# Altium PCB 7CUN RGB V0.0.1.PcbDoc
Units mil, origin at the board's own origin, x right, y up, seen from the top; angles counter-clockwise.
Board outline 3149.61 x 2165.35 mil, 2 copper layers (Top Layer, Bottom Layer); 76 components, 91 nets, 308 pads, 149 vias.
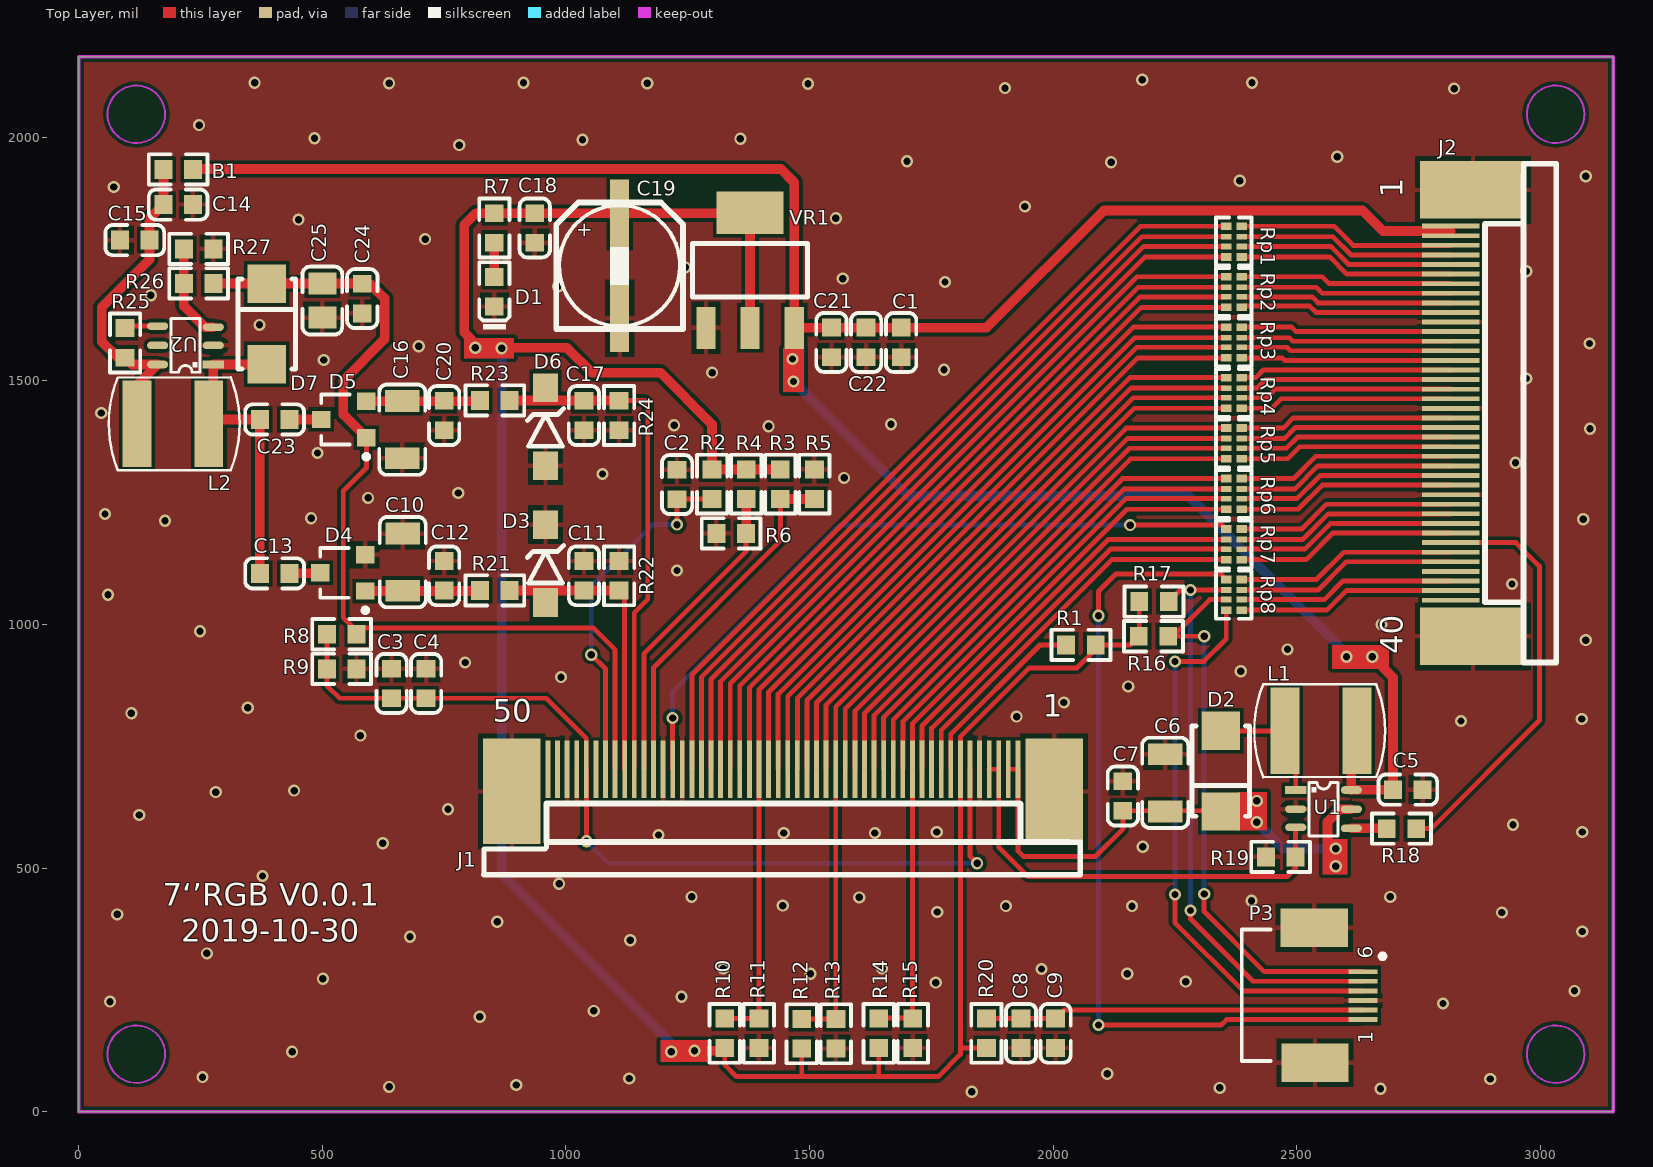
[diagram p0: Top Layer view]
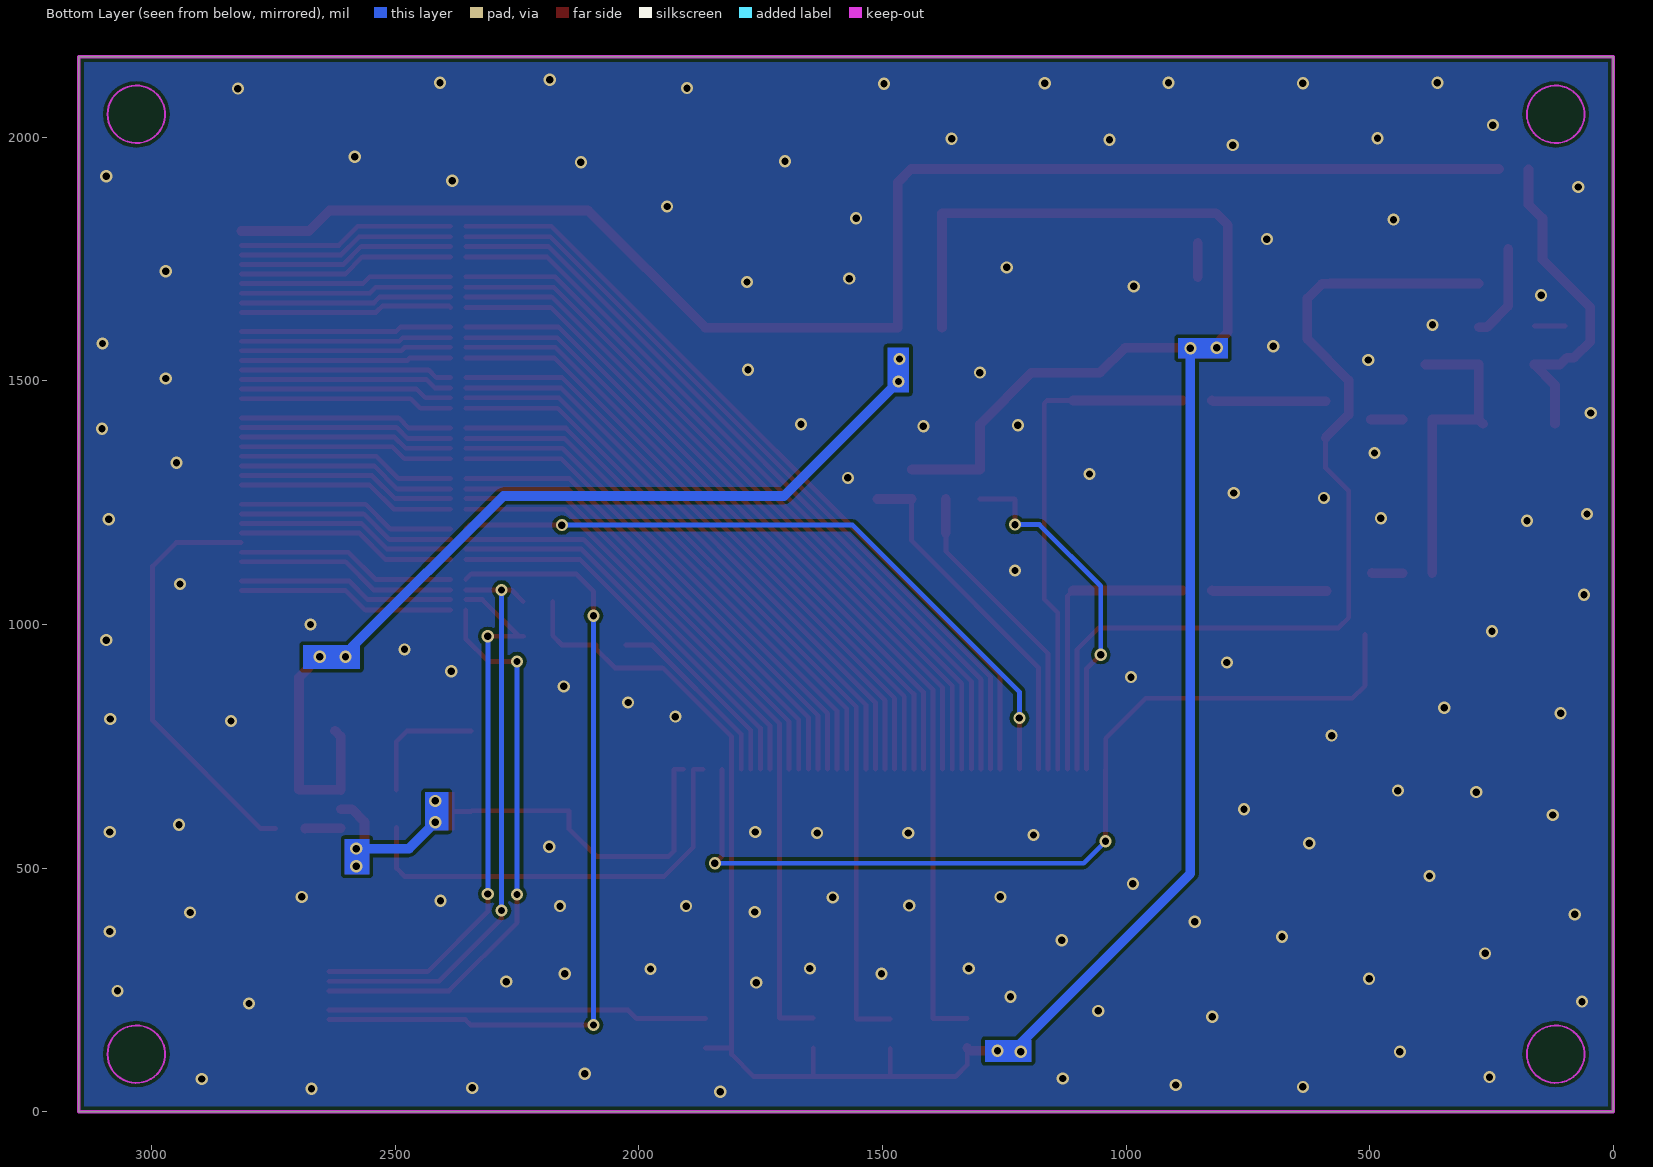
[diagram p1: Bottom Layer view, seen from below]
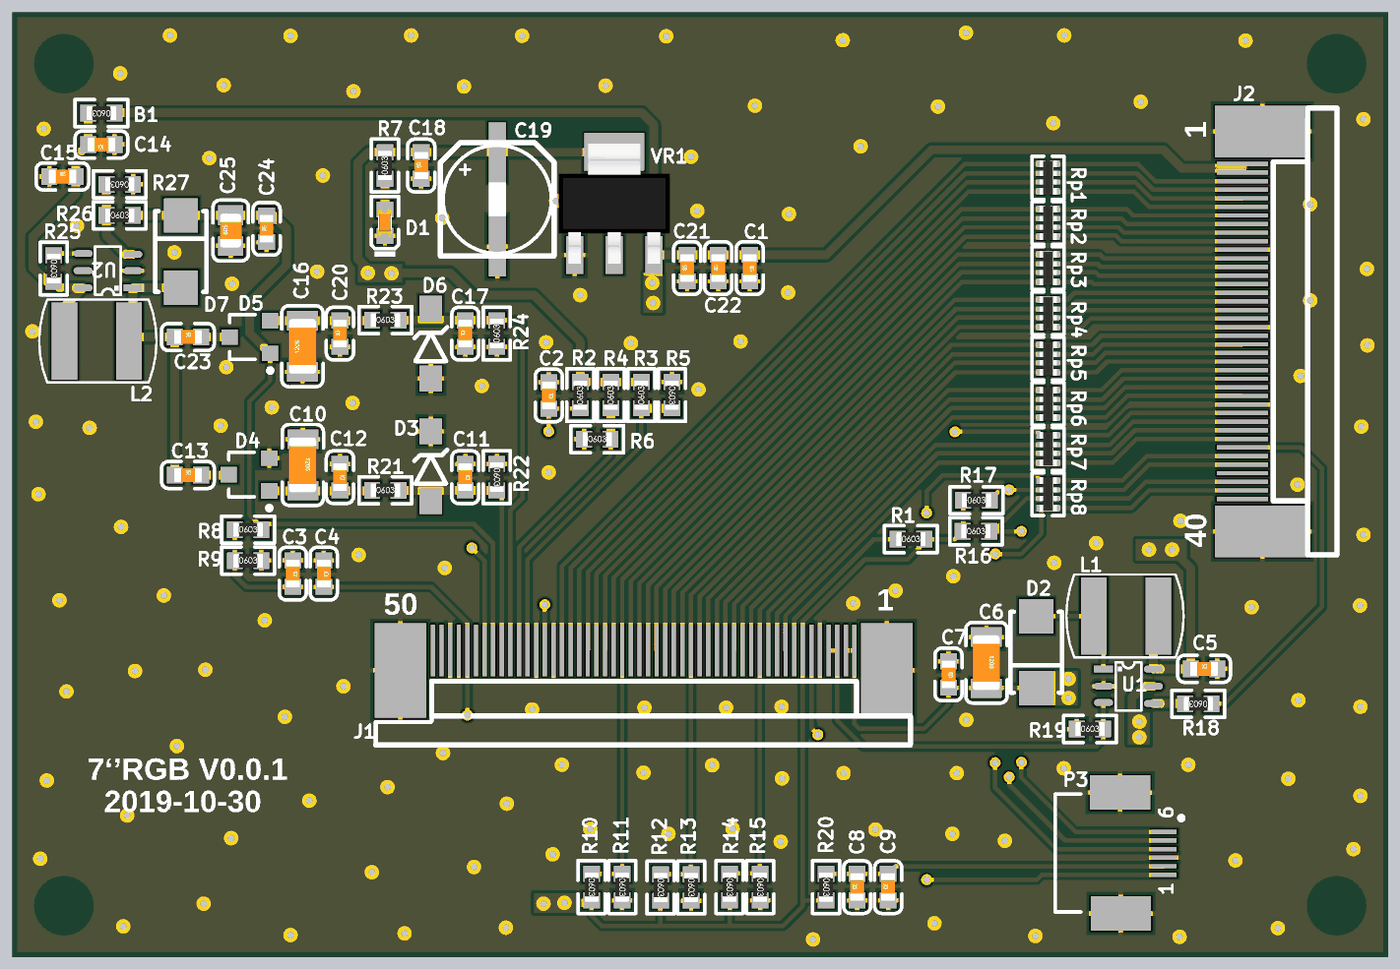
[diagram p2: 3D render of the assembled board from above, using the file's embedded part models]

## Layer stack, top to bottom
Top Layer: signal copper 1.4
Dielectric: dielectric 12.6, FR-4, Dk 4.8
Bottom Layer: signal copper 1.4

## Board outline
0,0 0,2165.35 3149.61,2165.35 3149.61,0

## Design rules (kind name [scope] priority, off if disabled: settings)
Clearance [All] p1: gap=7
ComponentClearance [All] p1: gap=0 collisioncheckmode=3 verticalgap=0 showdistances=FALSE
HoleToHoleClearance [All] p1: gap=0 allowstackedmicrovias=TRUE
MinimumSolderMaskSliver [All] p1: minsoldermaskwidth=0
PolygonConnect PolygonConnect_1 [IsVia] p1: connectstyle=Direct reliefconductorwidth=10 reliefentries=4 polygonreliefangle="90 Angle" airgapwidth=10
PolygonConnect [All] p2: connectstyle=Relief reliefconductorwidth=10 reliefentries=4 polygonreliefangle="90 Angle" airgapwidth=10
RoutingVias [All] p1: holewidth=15 width=25 viastyle="Through Hole" minholewidth=15 minwidth=25 maxholewidth=28 maxwidth=50
SilkToSilkClearance [All] p1: silktosilkclearance=0
SilkToSolderMaskClearance [IsPad] p1: minsilkscreentomaskgap=0 clearancetoexposedcopper=TRUE
SolderMaskExpansion [All] p1: expansion=4
Width [All] p1: maxlimit=50 minlimit=7 preferedwidth=10
23 further rules are at their usual default settings.

## Components (designator, comment, footprint, x,y, rotation, side; value= is the part's Value field where it differs from the comment)
B1 "0Ω (0R0) ±1%" 0603_R 204,1934 r180 top
C1 "100nF (104) 10% 50V" 0603_C 1688,1579 r270 top
C2 "100nF (104) 10% 50V" 0603_C 1228,1287.32 r270 top
C3 "1uF (105) 10% 50V" 0603_C 642,879 r270 top
C4 "100nF (104) 10% 50V" 0603_C 713,879 r270 top
C5 "10uF (106) 10% 10V" 0603_C 2728,661 r0 top
C6 "10uF (106) 10% 50V" 1206_C 2230,675 r270 top
C7 "100nF (104) 10% 50V" 0603_C 2143,648 r270 top
C8 "10uF (106) 10% 10V" 0603_C 1934,161 r90 top
C9 "100nF (104) 10% 50V" 0603_C 2005,161 r90 top
C10 "10uF (106) 10% 50V" 1206_C 665,1128 r270 top
C11 "1uF (105) 10% 50V" 0603_C 1037,1100 r270 top
C12 "100nF (104) 10% 50V" 0603_C 750,1100 r270 top
C13 "1uF (105) 10% 50V" 0603_C 402,1105 r0 top
C14 "10uF (106) 10% 10V" 0603_C 204,1862 r180 top
C15 "100nF (104) 10% 50V" 0603_C 115,1789 r0 top
C16 "10uF (106) 10% 50V" 1206_C 664,1400 r90 top
C17 "1uF (105) 10% 50V" 0603_C 1037,1429 r90 top
C18 "100nF (104) 10% 50V" 0603_C 936,1814 r90 top
C19 "SMD-CAP" SMD-6.5mm 1112,1742 r270 top
C20 "100nF (104) 10% 50V" 0603_C 750,1429 r90 top
C21 "100nF (104) 10% 50V" 0603_C 1545,1579 r90 top
C22 "10uF (106) 10% 10V" 0603_C 1616,1579 r90 top
C23 "1uF (105) 10% 50V" 0603_C 402,1421 r0 top
C24 "100nF (104) 10% 50V" 0603_C 582,1669 r90 top
C25 "22uF (226) 20% 25V" 0805_C 500,1665 r90 top
D1 "绿灯 0603" 0603_LED_S1 853,1683 r90 top
D2 "SS54" SMA(DO-214AC)_S1 2344,699 r90 top
D3 "LBZT52C6V8T1G" DIODE_ZMMx 958,1125 r90 top
D4 "BAT54S" SOT-23 547,1106 r90 top
D5 "BAT54S" SOT-23 549,1421 r90 top
D6 "LBZT52C16T1G" DIODE_ZMMx 958,1406 r90 top
D7 "SS54" SMA(DO-214AC)_S1 386,1617 r270 top
J1 "TFTLCD" TFT3.5-50pin下接 1593,695 r180 top locked
J2 "TFTLCD" FPC-40-0.5MM 2816,1424 r270 top
L1 "10uH" SOP_5020 2546,784 r0 top
L2 "10uH" SOP_5020 197,1410 r180 top
P3 "Touch_6P" Touch_6P 2535,233 r90 top locked
R1 "4.7KΩ (4701) ±1%" 0603_R 2057,958 r0 top
R2 "10KΩ (1002) ±1%" 0603_R 1300,1288 r90 top
R3 "10KΩ (1002) ±1%" 0603_R 1440,1288 r90 top
R4 "10KΩ (1002) ±1%" 0603_R 1370,1288 r90 top
R5 "10KΩ (1002) ±1%" 0603_R 1510,1288 r270 top
R6 "10KΩ (1002) ±1%" 0603_R 1339,1187 r0 top
R7 "2KΩ (2001) ±1%" 0603_R 853,1814 r90 top
R8 "51KΩ (5102) ±1%" 0603_R 539.68,980 r0 top
R9 "39KΩ (3902) ±1%" 0603_R 539.68,909 r0 top
R10 "10KΩ (1002) ±1%" 0603_R 1326,161 r270 top
R11 "10KΩ (1002) ±1%" 0603_R 1396,161 r270 top
R12 "10KΩ (1002) ±1%" 0603_R 1484,160 r270 top
R13 "10KΩ (1002) ±1%" 0603_R 1554,160 r270 top
R14 "10KΩ (1002) ±1%" 0603_R 1642,161 r270 top
R15 "10KΩ (1002) ±1%" 0603_R 1712,161 r270 top
R16 "4.7KΩ (4701) ±1%" 0603_R 2206,976 r0 top
R17 "4.7KΩ (4701) ±1%" 0603_R 2207,1047 r0 top
R18 "2KΩ (2001) ±1%" 0603_R 2715,581 r180 top
R19 "2.2Ω (2R20) ±1%" 0603_R 2467,523 r0 top
R20 "10Ω (10R0) ±1%" 0603_R 1863,161 r270 top
R21 "100Ω (1000) ±1%" 0603_R 854,1070 r0 top
R22 "47KΩ (4702) ±1%" 0603_R 1109,1100 r270 top
R23 "1KΩ (1001) ±1%" 0603_R 854,1460 r0 top
R24 "47KΩ (4702) ±1%" 0603_R 1109,1429 r90 top
R25 "100KΩ (1003) ±1%" 0603_R 95,1578 r270 top
R26 "130KΩ (1303) ±1%" 0603_R 246,1700 r0 top
R27 "8.2KΩ (8201) ±1%" 0603_R 246,1771 r180 top
Rp1 "33Ω (330) ±5%" 0402_Rx4 2371,1786 r270 top
Rp2 "33Ω (330) ±5%" 0402_Rx4 2371,1682.43 r270 top
Rp3 "33Ω (330) ±5%" 0402_Rx4 2371,1578.86 r270 top
Rp4 "33Ω (330) ±5%" 0402_Rx4 2371,1475.29 r270 top
Rp5 "33Ω (330) ±5%" 0402_Rx4 2371,1371.71 r270 top
Rp6 "33Ω (330) ±5%" 0402_Rx4 2371,1268.14 r270 top
Rp7 "33Ω (330) ±5%" 0402_Rx4 2371,1164.57 r270 top
Rp8 "33Ω (330) ±5%" 0402_Rx4 2371,1061 r90 top
U1 "SY7200A" SOT23-6 2555,622 r270 top
U2 "SY7208C" SOT23-6 219,1572 r90 top
VR1 "AMS1117-3.3" SOT-223 1378,1727 r270 top

## Footprints (in the part's own frame and the unit in brackets; to place one, negate y for a bottom-side part, rotate by r counter-clockwise, add the part's x,y. Pads: shape width x height; smd on the part's side, far side on the other; paste and mask are expansions set on the pad)
0402_Rx4 [mm]
  rect 0.4x0.55 smd mask+0.051: 1(-0.8,-0.4) 4(0.8,-0.4) 5(0.8,0.4) 8(-0.8,0.4)
  rect 0.3x0.55 smd mask+0.051: 2(-0.25,-0.4) 3(0.25,-0.4) 6(0.25,0.4) 7(-0.25,0.4)
  silkscreen extent -1.25,-0.93 1.25,0.92, body extent -1,-0.5 1,0.5, height 0.45
0603_C [mm]
  rect 0.93x0.98 smd: 1(-0.77,0) 2(0.77,0)
  silkscreen extent -1.53,-0.79 1.54,0.79, body extent -0.8,-0.4 0.8,0.4, height 0.3
0603_LED_S1 [mm]
  rect 0.93x0.98 smd: A(0.77,0) K(-0.77,0)
  silkscreen extent -1.98,-0.79 1.54,0.79, body extent -0.8,-0.4 0.8,0.4, height 0.6
0603_R [mm]
  rect 0.93x0.98 smd: 1(-0.77,0) 2(0.77,0)
  silkscreen extent -1.53,-0.79 1.54,0.79, body extent -0.85,-0.4 0.85,0.4, height 0.56
0805_C [mm]
  rect 1.16x1.47 smd: 1(-0.89,0) 2(0.89,0)
  silkscreen extent -1.77,-1.04 1.77,1.04, body extent -1,-0.62 1,0.63, height 0.77
1206_C [mm]
  rect 1.13x1.8 smd: 1(-1.49,0) 2(1.49,0)
  silkscreen extent -2.36,-1.2 2.35,1.2, body extent -1.6,-0.81 1.6,0.79, height 1
DIODE_ZMMx [mm]
  rect 1.5x1.3 smd: 1(-2.032,0) 2(2.032,0)
  silkscreen extent -1.02,-0.95 0.95,0.95
FPC-40-0.5MM [mm]
  rect 0.25x3 smd: 1(-10,0) 2(-9.5,0) 3(-9,0) 4(-8.5,0) 5(-8,0) 6(-7.5,0) 7(-7,0) 8(-6.5,0) 9(-6,0) 10(-5.5,0) 11(-5,0) 12(-4.5,0) 13(-4,0) 14(-3.5,0) 15(-3,0) 16(-2.5,0) 17(-2,0) 18(-1.5,0) 19(-1,0) 20(-0.5,0) 21(0,0) 22(0.5,0) 23(1,0) 24(1.5,0) 25(2,0) 26(2.5,0) 27(3,0) 28(3.5,0) 29(4,0) 30(4.5,0) 31(5,0) 32(5.5,0) 33(6,0) 34(6.5,0) 35(7,0) 36(7.5,0) 37(8,0) 38(8.5,0) 39(9,0) 40(9.5,0)
  rect 3x5.5 smd: A(-11.887,1.159) B(11.387,1.159)
  silkscreen extent -13.25,1.79 12.75,5.5
SMA(DO-214AC)_S1 [mm]
  rect 2x2 smd: 1(2.1,0) 2(-2.1,0)
  silkscreen extent -2.35,-1.5 2.35,1.5
SMD-6.5mm [mm]
  rect 3.5x1 smd: 1(-2.593,-0.049) 2(2.882,-0.049)
  silkscreen extent -3.16,-3.35 3.44,3.26
SOP_5020 [mm]
  rect 1.5x4.5 smd: 1(1.972,-0.051) 2(-1.778,-0.051)
  silkscreen extent -3.38,-2.47 3.44,2.37
SOT23-6 [mm]
  rect 0.4x1.1 smd: 1(-0.975,-1.45)
  oval 0.4x1.1 smd: 2(0.025,-1.45) 3(0.975,-1.45) 4(1.025,1.45) 5(0.025,1.45) 6(-0.975,1.45)
  silkscreen extent -1.37,-0.75 1.43,0.75
SOT-23 [mm]
  rect 0.9x0.95 smd: 1(-0.95,-1.048) 2(0.95,-1.048) 3(0,1.302)
  silkscreen extent -2.07,-1.17 1.3,1.3
SOT-223 [mm]
  rect 2.2x1 smd: 1(3,-2.3) 2(3,0) 3(3,2.3)
  rect 2.2x3.5 smd: 2(-3,0)
  silkscreen extent -1.4,-3 1.4,3, body extent -3.49,-3.24 3.49,3.24, height 1.64
TFT3.5-50pin下接 [mm]
  rect 3x5.5 smd: 0(-10.388,0.956) 0(17.889,0.956)
  rect 0.25x3 smd: 1(-8.501,-0.203) 2(-8.001,-0.203) 3(-7.501,-0.203) 4(-7.001,-0.203) 5(-6.501,-0.203) 6(-6.001,-0.203) 7(-5.501,-0.203) 8(-5.001,-0.203) 9(-4.501,-0.203) 10(-4.001,-0.203) 11(-3.501,-0.203) 12(-3.001,-0.203) 13(-2.501,-0.203) 14(-2.001,-0.203) 15(-1.501,-0.203) 16(-1.001,-0.203) 17(-0.501,-0.203) 18(-0.001,-0.203) 19(0.499,-0.203) 20(0.999,-0.203) 21(1.499,-0.203) 22(1.999,-0.203) 23(2.499,-0.203) 24(2.999,-0.203) 25(3.499,-0.203) 26(3.999,-0.203) 27(4.499,-0.203) 28(4.999,-0.203) 29(5.499,-0.203) 30(5.999,-0.203) 31(6.499,-0.203) 32(6.999,-0.203) 33(7.499,-0.203) 34(7.999,-0.203) 35(8.499,-0.203) 36(8.999,-0.203) 37(9.499,-0.203) 38(9.999,-0.203) 39(10.499,-0.203) 40(10.999,-0.203) 41(11.502,-0.203) 42(12.002,-0.203) 43(12.502,-0.203) 44(13.002,-0.203) 45(13.502,-0.203) 46(14.002,-0.203) 47(14.502,-0.203) 48(15.002,-0.203) 49(15.502,-0.203) 50(16.002,-0.203)
  silkscreen extent -11.75,1.59 19.33,5.3
Touch_6P [mm]
  rect 2x3.5 smd: 0(-3.368,-0.065) 0(3.668,-0.025)
  rect 0.25x1.5 smd: 1(-1.118,-2.565) 2(-0.618,-2.565) 3(-0.118,-2.565) 4(0.382,-2.565) 5(0.882,-2.565) 6(1.382,-2.565)
  silkscreen extent -3.28,-3.71 3.58,3.76

## Part data
B1: library part "0603 0Ω (0R0) 1%", "贴片电阻"
C1 C2 C4 C7 C9 C12 C15 C18 C20 C21 C24: library part "0603 100nF (104) 10% 50V", "贴片电容"
C3 C11 C13 C17 C23: library part "0603 1uF (105) 10% 50V", "贴片电容"
C5 C8 C14 C22: library part "0603 10uF (106) 10% 10V", "贴片电容"
C6 C10 C16: library part "1206 10uF (106) 10% 50V", "贴片电容"
C25: library part "0805 22uF (226) 20% 25V", "贴片电容"
D1: library part "0603 绿灯", "发光二极管"
D2 D7: library part "SMA(DO-214AC) SS54", "二极管"
D3 D6: library part ZMM3V6, "ZMM3V6"
D4 D5: "双肖特基二极管"
J1: library part AT070TN92, "7' TFTLCD"
J2: library part FPC-40, "FPC-40P-0.5mm"
L1 L2: library part L-SOP(5020)
R1 R16 R17: library part "0603 4.7KΩ (4701) 1%", "贴片电阻"
R2 R3 R4 R5 R6 R10 R11 R12 R13 R14 R15: library part "0603 10KΩ (1002) 1%", "贴片电阻"
R7 R18: library part "0603 2KΩ (2001) 1%", "贴片电阻"
R8: library part "0603 51KΩ (5102) 1%", "贴片电阻"
R9: library part "0603 39KΩ (3902) 1%", "贴片电阻"
R19: library part "0603 2.2Ω (2R20) 1%", "贴片电阻"
R20: library part "0603 10Ω (10R0) 1%", "贴片电阻"
R21: library part "0603 100Ω (1000) 1%", "贴片电阻"
R22 R24: library part "0603 47KΩ (4702) 1%", "贴片电阻"
R23: library part "0603 1KΩ (1001) 1%", "贴片电阻"
R25: library part "0603 100KΩ (1003) 1%", "贴片电阻"
R26: library part "0603 130KΩ (1303) 1%", "贴片电阻"
R27: library part "0603 8.2KΩ (8201) 1%", "贴片电阻"
Rp1 Rp2 Rp3 Rp4 Rp5 Rp6 Rp7 Rp8: library part "0402*4 33Ω (330) 5%", "贴片排阻"
VR1: library part "SOT-223 AMS1117-3.3", "低压差线性稳压(LDO)"

## Via types
v1: diameter 25, hole 15, Top Layer to Bottom Layer, 149 vias

## Nets (pads, with @x,y where several pads share a name; then routed paths per layer and width w, separated by ;. In a path a pad name is that pad's centre, name@x,y a point inside that pad or via, vN(x,y) a via of type N, cw(c..) or ccw(c..) an arc to the next point about the centre after c; other vN are vias at no path point)
BL_GND: J1.3 J1.4 R19.2 U1.3 | length 905
  Top Layer w10: J1.4 J1.3 1888.33,542.67 1948,483 2481,483 2497.32,499.32 R19.2 2497.32,583 U1.3
BL_VCC: C6.2 C7.2 D2.2 J1.1 J1.2 U1.5 | length 1048.7
  Top Layer w10: J1.2 J1.1 1927.7,535.3 1939,524 2087,524 2143,580 C7.2 2342.64,617.68 D2.2 2421.68,616.32
  Top Layer w20: 2563,538 2563,595 2589,621 U1.5
  Bottom Layer w20: v1(2418,594) 2472,540 v1(2580,540)
  other v1: 2580,504 2418,638
CT_INT: P3.4 Rp8.8 | length 1163.8
  Top Layer w10: v1(2250,446) 2250,388 2389.94,248.06 P3.4 ; v1(2250,924.25) 2309.25,924.25 2355.25,970.25 Rp8.8
  Bottom Layer w10: v1(2250,446) v1(2250,924.25)
CT_RST: P3.1 Rp8.5 | length 1719.5
  Top Layer w10: v1(2093,178) 2345,178 2356,189 P3.1 ; v1(2093,1018) 2093,1068 2129,1104 2343.75,1104 Rp8.5
  Bottom Layer w10: v1(2093,178) v1(2093,1018)
CT_SCL: P3.6 R16.2 Rp8.7 | length 1165.9
  Top Layer w10: v1(2310,447) 2310,411 2433.57,287.42 P3.6 ; v1(2310,976) R16.2 2246,976 2321.16,1051.16 Rp8.7
  Bottom Layer w10: v1(2310,447) v1(2310,976)
CT_SDA: P3.5 R17.2 Rp8.6 | length 1209.9
  Top Layer w10: R17.2 2261.16,1070.84 Rp8.6 ; v1(2282,413) 2282,396 2410.26,267.74 P3.5
  Bottom Layer w10: v1(2282,413) v1(2282,1071)
GND: C1.2 C2.1 C3.1 C4.1 C5.2 C6.1 C7.1 C8.1 C9.1 C10.1 C11.1 C12.1 C14.1 C15.1 C16.1 C17.1 C18.1 C19.2 C20.1 C21.1 C22.1 C24.1 C25.1 D1.K D3.2 D4.2 D6.1 J1.0 J1.5 J1.36 J1.38 J1.47 J1.48 J2.11 J2.20 J2.29 J2.A J2.B P3.0 P3.3 R5.1 R6.1 R9.2 R11.2 R13.2 R15.2 R19.1 R22.1 R24.1 R27.1 U1.2 U2.2 VR1.1
  other v1: 1833,41 2672,47 2342,49 637,51 898,55 2897,67 1130,68 254,71 2111,78 438,123 823,195 1057,207 2800,222 64,226 1237,236 3070,248 1759,265 2272,267 501,273 1502,283 2152,283 1976,293 1323,294 1649,294 263,325 1132,352 680,359 3086,370 859,390 79,405 2921,409 1762,410 1903,422 2162,422 1445,423 2407,433 1602,440 1258,441 2692,441 986,468 377,484 2184,544 624,551 1190,568 1447,572 1634,572 1761,574 3086,574 2944,589 124,609 758,621 281,656 442,659 578,772 2837,802 3085,806 1925,811 108,818 347,829 2022,840 2154,873 990,892 2385,904 793,922 2481,949 3093,968 249,986 2674,1000 60,1061 2942,1083 1228,1111 177,1213 3088,1216 477,1218 54,1227 594,1260 779,1270 1571,1301 1075,1309 2949,1332 490,1352 3102,1402 1416,1407 1222,1409 1667,1411 46,1434 2971,1505 1300,1517 1776,1523 503,1543 698,1571 3101,1577 371,1615 148,1676 984,1694 1778,1703 1568,1710 2971,1725 1245,1733 711,1791 451,1831 1554,1834 1942,1858 72,1898 2383,1911 3093,1920 2119,1949 1700,1951 2583,1960 781,1984 1034,1995 1358,1997 484,1998 247,2025 2823,2100 1901,2101 1497,2110 637,2111 1167,2111 361,2112 913,2112 2408,2112 2183,2118
LCD_B0: J2.21 Rp5.8 | length 437.9
  Top Layer w10: Rp5.8 2472.09,1403.21 2492.88,1424 J2.21
LCD_B1: J2.22 Rp5.7 | length 438.7
  Top Layer w10: Rp5.7 2474.47,1381.56 2497.23,1404.31 J2.22
LCD_B2: J2.23 Rp5.6 | length 438.7
  Top Layer w10: Rp5.6 2478.83,1361.87 2501.59,1384.63 J2.23
LCD_B3: J2.24 Rp5.5 | length 439.5
  Top Layer w10: Rp5.5 2481.22,1340.22 2505.94,1364.94 J2.24
LCD_B4: J2.25 Rp6.8 | length 448.1
  Top Layer w10: Rp6.8 2493.51,1299.64 2539.14,1345.26 J2.25
LCD_B5: J2.26 Rp6.7 | length 449
  Top Layer w10: Rp6.7 2495.9,1277.99 2543.49,1325.57 J2.26
LCD_B6: J2.27 Rp6.6 | length 449
  Top Layer w10: Rp6.6 2500.26,1258.3 2547.85,1305.89 J2.27
LCD_B7: J2.28 Rp6.5 | length 449.8
  Top Layer w10: Rp6.5 2502.65,1236.65 2552.2,1286.2 J2.28
LCD_BL: J2.34 R18.1 | length 863.6
  Top Layer w10: R18.1 2776,581 2998,803 2998,1120 2949.91,1168.09 J2.34
LCD_CLK: J2.30 Rp7.8 | length 450.3
  Top Layer w10: Rp7.8 2509.94,1196.07 2560.71,1246.83 J2.30
LCD_DE: J2.33 Rp7.5 | length 451.9
  Top Layer w10: Rp7.5 2519.08,1133.08 2573.78,1187.78 J2.33
LCD_G0: J2.12 Rp3.8 | length 433.1
  Top Layer w10: Rp3.8 2489.65,1610.35 2498.83,1601.17 J2.12
LCD_G1: J2.13 Rp3.7 | length 432.2
  Top Layer w10: Rp3.7 2484.3,1588.7 2491.52,1581.48 J2.13
LCD_G2: J2.14 Rp3.6 | length 432.2
  Top Layer w10: Rp3.6 2479.94,1569.01 2487.16,1561.8 J2.14
LCD_G3: J2.15 Rp3.5 | length 431.4
  Top Layer w10: Rp3.5 2469.64,1547.36 2474.89,1542.11 J2.15
LCD_G4: J2.16 Rp4.8 | length 435.7
  Top Layer w10: Rp4.8 2415.74,1506.78 2431.38,1522.43 J2.16
LCD_G5: J2.17 Rp4.7 | length 436.5
  Top Layer w10: Rp4.7 2418.13,1485.13 2435.74,1502.74 J2.17
LCD_G6: J2.18 Rp4.6 | length 436.5
  Top Layer w10: Rp4.6 2438.44,1465.44 2456.06,1483.05 J2.18
LCD_G7: J2.19 Rp4.5 | length 437.4
  Top Layer w10: Rp4.5 2448.79,1443.79 2468.37,1463.37 J2.19
LCD_HSYNC: J2.31 Rp7.7 | length 451.1
  Top Layer w10: Rp7.7 2512.33,1174.41 2565.07,1227.15 J2.31
LCD_R0: J2.3 Rp1.8 | length 445.5
  Top Layer w10: Rp1.8 2576.63,1817.5 2615.79,1778.33 J2.3
LCD_R1: J2.4 Rp1.7 | length 444.7
  Top Layer w10: Rp1.7 2574.24,1795.84 2611.44,1758.65 J2.4
LCD_R2: J2.5 Rp1.6 | length 444.7
  Top Layer w10: Rp1.6 2569.88,1776.16 2607.08,1738.96 J2.5
LCD_R3: J2.6 Rp1.5 | length 443.8
  Top Layer w10: Rp1.5 2567.5,1754.5 2602.72,1719.28 J2.6
LCD_R4: J2.7 Rp2.8 | length 435.2
  Top Layer w10: Rp2.8 2552.08,1713.92 2566.41,1699.59 J2.7
LCD_R5: J2.8 Rp2.7 | length 434.4
  Top Layer w10: Rp2.7 2539.73,1692.27 2552.09,1679.91 J2.8
LCD_R6: J2.9 Rp2.6 | length 434.4
  Top Layer w10: Rp2.6 2531.41,1672.59 2543.78,1660.22 J2.9
LCD_R7: J2.10 Rp2.5 | length 436.1
  Top Layer w10: Rp2.5 2389.8,1653.98 2525.98,1653.98 2539.42,1640.54 J2.10
LCD_VSYNC: J2.32 Rp7.6 | length 451.1
  Top Layer w10: Rp7.6 2516.69,1154.73 2569.42,1207.46 J2.32
NetB1_2: B1.2 C14.2 C15.2 L2.1 R25.2 U2.6 | length 679.3
  Top Layer w20: L2.1 119.36,1491.08 U2.6 161.86,1533.68 161.8,1533.63 109.05,1533.63 R25.2 80.32,1547.68 47,1581 47,1651 145.32,1749.32 C15.2 145.32,1833.63 C14.2 B1.2
NetC2_2: C2.2 J1.44 R2.1 | length 740.5
  Top Layer w10: v1(1052,938) 1081.09,908.91 J1.44 ; v1(1228,1205) C2.2 1228.69,1257.69 R2.1
  Bottom Layer w10: v1(1052,938) 1052,1079 1178,1205 v1(1228,1205)
NetC3_2: C3.2 C4.2 J1.6 J1.46 R8.1 R9.1 | length 1913.7
  Top Layer w10: R8.1 R9.1 509.37,874.63 535.32,848.68 C3.2 C4.2 959.32,848.68 1041.72,766.28 J1.46 1042,702.72 v1(1042,555) ; J1.6 1829.28,524.72 v1(1844,510)
  Bottom Layer w10: v1(1042,555) 1087,510 v1(1844,510)
NetC8_2: C8.2 C9.2 P3.2 R20.1 | length 780.2
  Top Layer w10: R20.1 C9.2 2022.37,208.69 2152,208.69 P3.2
NetC10_2: C10.2 C12.2 D4.1 R21.1 | length 236
  Top Layer w20: D4.1 822.28,1068.6 R21.1
NetC13_1: C13.1 C23.1 D7.1 L2.2 U2.1 | length 646.1
  Top Layer w20: L2.2 276.09,1421.09 U2.1 D7.1@385.31,1533.63 ; L2.2@276.17,1421 C23.1 C13.1
NetC13_2: C13.2 D4.3 | length 63.8
  Top Layer w20: C13.2 494.74,1105 D4.3
NetC16_2: C16.2 C20.2 D5.2 R23.1 | length 234.1
  Top Layer w20: D5.2 822.09,1458.4 R23.1
NetC23_2: C23.2 D5.3 | length 65.4
  Top Layer w20: C23.2 D5.3
NetD1_A: D1.A R7.1 | length 70.4
  Top Layer w20: D1.A R7.1
NetD2_1: D2.1 L1.2 U1.1 | length 262.2
  Top Layer w10: D2.1 2475.68,781.68 2497.91,759.44 U1.1
NetJ1_8: J1.8 R1.1 | length 384.5
  Top Layer w10: J1.8 1789.91,774.91 1973,958 R1.1
NetR18_2: R18.2 U1.4 | length 72.9
  Top Layer w20: U1.4 2684.06,581.63 R18.2
NetR25_1: R25.1 U2.4 | length 62.9
  Top Layer w10: R25.1@99.06,1612.37 U2.4
NetR26_1: R26.1 R27.2 U2.3 | length 195.9
  Top Layer w20: R27.2 215.68,1653.32 258.6,1610.4 U2.3
RESET: J2.40
TFT_B0: J1.19 Rp5.1 | length 1144.4
  Top Layer w10: J1.19 1573.37,826.7 2149.88,1403.21 Rp5.1
TFT_B1: J1.18 Rp5.2 | length 1113.2
  Top Layer w10: J1.18 1593.06,822.35 2152.26,1381.56 Rp5.2
TFT_B2: J1.17 Rp5.3 | length 1082.8
  Top Layer w10: J1.17 1612.74,817.99 2156.62,1361.87 Rp5.3
TFT_B3: J1.16 Rp5.4 | length 1051.6
  Top Layer w10: J1.16 1632.43,813.63 2159.01,1340.22 Rp5.4
TFT_B4: J1.15 Rp6.1 | length 1012.5
  Top Layer w10: J1.15 1652.11,809.28 2142.47,1299.64 Rp6.1
TFT_B5: J1.14 Rp6.2 | length 981.3
  Top Layer w10: J1.14 1671.8,804.92 2144.86,1277.99 Rp6.2
TFT_B6: J1.13 Rp6.3 | length 950.9
  Top Layer w10: J1.13 1691.48,800.57 2149.22,1258.3 Rp6.3
TFT_B7: J1.12 R14.1 R15.1 Rp6.4 | length 1498.9
  Top Layer w10: R14.1@1642.83,192.15 1711.17,192.15 J1.12 1711.17,796.21 2151.6,1236.65 Rp6.4
TFT_CLK: J1.37 Rp7.1 | length 1440.2
  Top Layer w10: J1.37 v1(1219,808) ; v1(2158,1204) 2347.32,1204 Rp7.1
  Bottom Layer w10: v1(1219,808) 1219,862 1561,1204 v1(2158,1204)
TFT_DE: J1.9 Rp7.4 | length 810.1
  Top Layer w10: J1.9 1770.22,783.14 2120.16,1133.08 Rp7.4
TFT_G0: J1.27 Rp3.1 | length 1408.1
  Top Layer w10: J1.27 1415.89,861.56 2164.69,1610.35 Rp3.1
TFT_G1: J1.26 Rp3.2 | length 1376.9
  Top Layer w10: J1.26 1435.57,857.2 2167.07,1588.7 Rp3.2
TFT_G2: J1.25 Rp3.3 | length 1346.5
  Top Layer w10: J1.25 1455.26,852.84 2171.43,1569.01 Rp3.3
TFT_G3: J1.24 Rp3.4 | length 1315.3
  Top Layer w10: J1.24 1474.94,848.49 2173.82,1547.36 Rp3.4
TFT_G4: J1.23 Rp4.1 | length 1276.2
  Top Layer w10: J1.23 1494.63,844.13 2157.28,1506.78 Rp4.1
TFT_G5: J1.22 Rp4.2 | length 1245
  Top Layer w10: J1.22 1514.31,839.77 2159.67,1485.13 Rp4.2
TFT_G6: J1.21 Rp4.3 | length 1214.6
  Top Layer w10: J1.21 1534,835.42 2164.03,1465.44 Rp4.3
TFT_G7: J1.20 R12.1 R13.1 Rp4.4 | length 1765.2
  Top Layer w10: R12.1@1484.31,190.63 1553.69,190.63 J1.20 1553.69,831.06 2166.41,1443.79 Rp4.4
TFT_HS: J1.11 Rp7.2 | length 871.7
  Top Layer w10: J1.11 1730.85,791.85 2113.41,1174.41 Rp7.2
TFT_LR: J1.39 R3.1 R5.2 | length 732.5
  Top Layer w10: J1.39 1179.67,911.67 1440,1172 R3.1
  Top Layer w20: R3.1 R5.2
TFT_R0: J1.35 Rp1.1 | length 1671.8
  Top Layer w10: J1.35 1258.41,896.41 2179.5,1817.5 Rp1.1
TFT_R1: J1.34 Rp1.2 | length 1640.6
  Top Layer w10: J1.34 1278.09,892.05 2181.88,1795.84 Rp1.2
TFT_R2: J1.33 Rp1.3 | length 1610.2
  Top Layer w10: J1.33 1297.78,887.7 2186.24,1776.16 Rp1.3
TFT_R3: J1.32 Rp1.4 | length 1579
  Top Layer w10: J1.32 1317.46,883.34 2188.63,1754.5 Rp1.4
TFT_R4: J1.31 Rp2.1 | length 1539.9
  Top Layer w10: J1.31 1337.15,878.98 2172.09,1713.92 Rp2.1
TFT_R5: J1.30 Rp2.2 | length 1508.7
  Top Layer w10: J1.30 1356.83,874.63 2174.48,1692.27 Rp2.2
TFT_R6: J1.29 Rp2.3 | length 1478.3
  Top Layer w10: J1.29 1376.52,870.27 2178.84,1672.59 Rp2.3
TFT_R7: J1.28 R10.1 R11.1 Rp2.4 | length 2028.9
  Top Layer w10: R10.1 1326.2,191.52 1396.2,191.52 J1.28 1396.2,865.91 2181.22,1650.93 Rp2.4
TFT_UD: J1.40 R4.1 R6.2 | length 640.7
  Top Layer w10: J1.40 1159.98,939.98 1369.32,1149.32 R6.2
  Top Layer w20: R6.2@1370,1187.68 R4.1
TFT_VS: J1.10 Rp7.3 | length 841.3
  Top Layer w10: J1.10 1750.54,787.5 2117.77,1154.73 Rp7.3
TP_INT: J2.39 Rp8.1 | length 445.9
  Top Layer w10: Rp8.1 2561.5,1029.5 2601.67,1069.67 J2.39
TP_RST: J2.35 Rp8.4 | length 452.4
  Top Layer w10: Rp8.4 2540.5,1092.5 2596.41,1148.41 J2.35
TP_SCL: J2.38 Rp8.2 | length 445.1
  Top Layer w10: Rp8.2 2556.16,1051.16 2594.35,1089.35 J2.38
TP_SDA: J2.36 Rp8.3 | length 453.2
  Top Layer w10: Rp8.3 2543.84,1070.84 2601.72,1128.72 J2.36
VCC3.3: C18.2 C19.1 J1.7 R1.2 R2.2 R3.2 R4.2 R7.2 R10.2 R12.2 R14.2 R16.1 R17.1 R20.2 VR1.2 | length 5421.3
  Top Layer w10: R10.2 1326,96 1350,72 1764,72 1809.59,117.59 1809.59,130 ; 1484,73 R12.2 ; 1642,73 R14.2 ; 1809.59,130.68 J1.7 1809.59,769.59 1951,911 2049,911 2087.32,949.32 R1.2 2157.69,958 R16.1 ; 1810.28,130.68 R20.2 ; R16.1@2176.69,977 R17.1
  Top Layer w20: v1(1264,125) 1320.32,125 R10.2 ; VR1.2@1378,1608.89 1378,1843.52 1377.2,1844.32 R7.2 815.32,1844.32 791,1820 791,1600 823,1568 1002,1568 1053,1517 1194,1517 1300,1411 R2.2 R4.2 R3.2
  Bottom Layer w20: v1(868,1567) 868,489 1232,125
  other v1: 1216,123 814,1568
VCC5.0: B1.1 C1.1 C5.1 C21.2 C22.2 J2.1 J2.2 L1.1 U1.6 VR1.3 | length 4860.8
  Top Layer w20: B1.1@234.31,1935 1441,1935 1468.55,1907.45 VR1.3 1468.98,1609.32 C21.2 C22.2 C1.1 1863.31,1609.32 2104,1850 2635,1850 2677.14,1807.86 2816,1807.86 ; L1.1 2612.09,770.45 U1.6 2612.72,661 C5.1 2697.69,891.32 v1(2655,934)
  Bottom Layer w20: v1(1467,1499) 1702,1264 2278,1264 2589.5,952.5
  other v1: 2602,934 1465,1545
VCC10.4: C24.2 C25.2 D5.1 D7.2 J1.43 R8.2 R26.2 | length 1924.1
  Top Layer w10: D5.1 590.26,1321.26 543,1274 543,1014 564,993 1056,993 1100.78,948.22 J1.43
  Top Layer w20: R26.2 581.32,1700 C24.2 597.68,1699.32 628,1669 628,1586 543,1501 543,1430.86 D5.1
VCC16: C17.2 D6.2 J1.41 R23.2 R24.2 | length 1048.7
  Top Layer w10: R24.2@1108.32,1460 1162,1460 1168,1454 1168,1052 1140.15,1024.15 J1.41
  Top Layer w20: R23.2 R24.2@1108.32,1460
VCC-7: C11.2 D3.1 J1.42 R21.2 R22.2 | length 596.2
  Top Layer w10: R22.2@1108.68,1070 R22.2 1120.46,1058.22 J1.42
  Top Layer w20: R21.2 R22.2@1108.68,1070
pads on no net: J1.45 J1.49 J1.50 J2.37 U2.5

## Polygon pours and split planes (outlines as drawn)
GND on Top Layer "Top Layer-No Net" (solid, remove dead copper): 0,0 3149.61,0 3149.61,2165 3149.25,2165.35 0,2165.35
GND on Bottom Layer "Top Layer-No Net" (solid, remove dead copper, pour order 3): 0,0 3149.61,0 3149.61,2165.35 0,2165.35

## Keep-outs
Keep-Out Layer:
  circle w3.94: c3031.5,118.11 r59.06
  circle w3.94: c3031.5,2047.24 r59.06
  circle w3.94: c118.11,2047.24 r59.06
  circle w3.94: c118.11,118.11 r59.06
  lines w7.87: 0,0 0,2165.35 3149.61,2165.35 3149.61,0 0,0

## Other copper
Top Layer:
  rectangle net VCC5.0: 2572,909 2689,958
  rectangle net VCC5.0: 1445,1477 1489,1568
  rectangle net VCC3.3: 1194,102 1290,147
  rectangle net VCC3.3: 791,1546 893,1588
  rectangle net BL_VCC: 2553,487 2604,560
  rectangle net BL_VCC: 2378,577 2439,656
Bottom Layer:
  rectangle net VCC5.0: 2572,909 2689,958
  rectangle net VCC5.0: 1445,1476 1490,1569
  rectangle net VCC3.3: 1194,102 1290,147
  rectangle net VCC3.3: 791,1546 893,1588
  rectangle net BL_VCC: 2553,487 2604,560
  rectangle net BL_VCC: 2391,577 2439,656

## Silkscreen, mask and mechanical layers (free items; w line width, h text height)
Top Overlay:
  text "1" at 2733,1876 h80 r90
  text "40" at 2733,939 h80 r90
  text "1" at 1979,795 h80
  text "50" at 850,785 h80
  text "7‘’RGB V0.0.1" at 172,407 h80
  text "2019-10-30" at 210,333 h80

## Text inside footprints (layer, text, board x,y; h text height)
C19: Top Overlay "+" at 1024.89,1827.13 h30 r270
P3: Top Overlay "1" at 2656,139 h30 r90; Top Overlay "6" at 2656,314 h30 r90